# Altium PCB mini_backplane.PcbDoc (part 2 of 5)
Units mm, origin at the board's own origin, x right, y up, seen from the top; angles counter-clockwise.
Board outline 232.03 x 195 mm, 4 copper layers (Top Layer, GND, POWER, Bottom Layer); 241 components, 200 nets, 1637 pads, 676 vias.
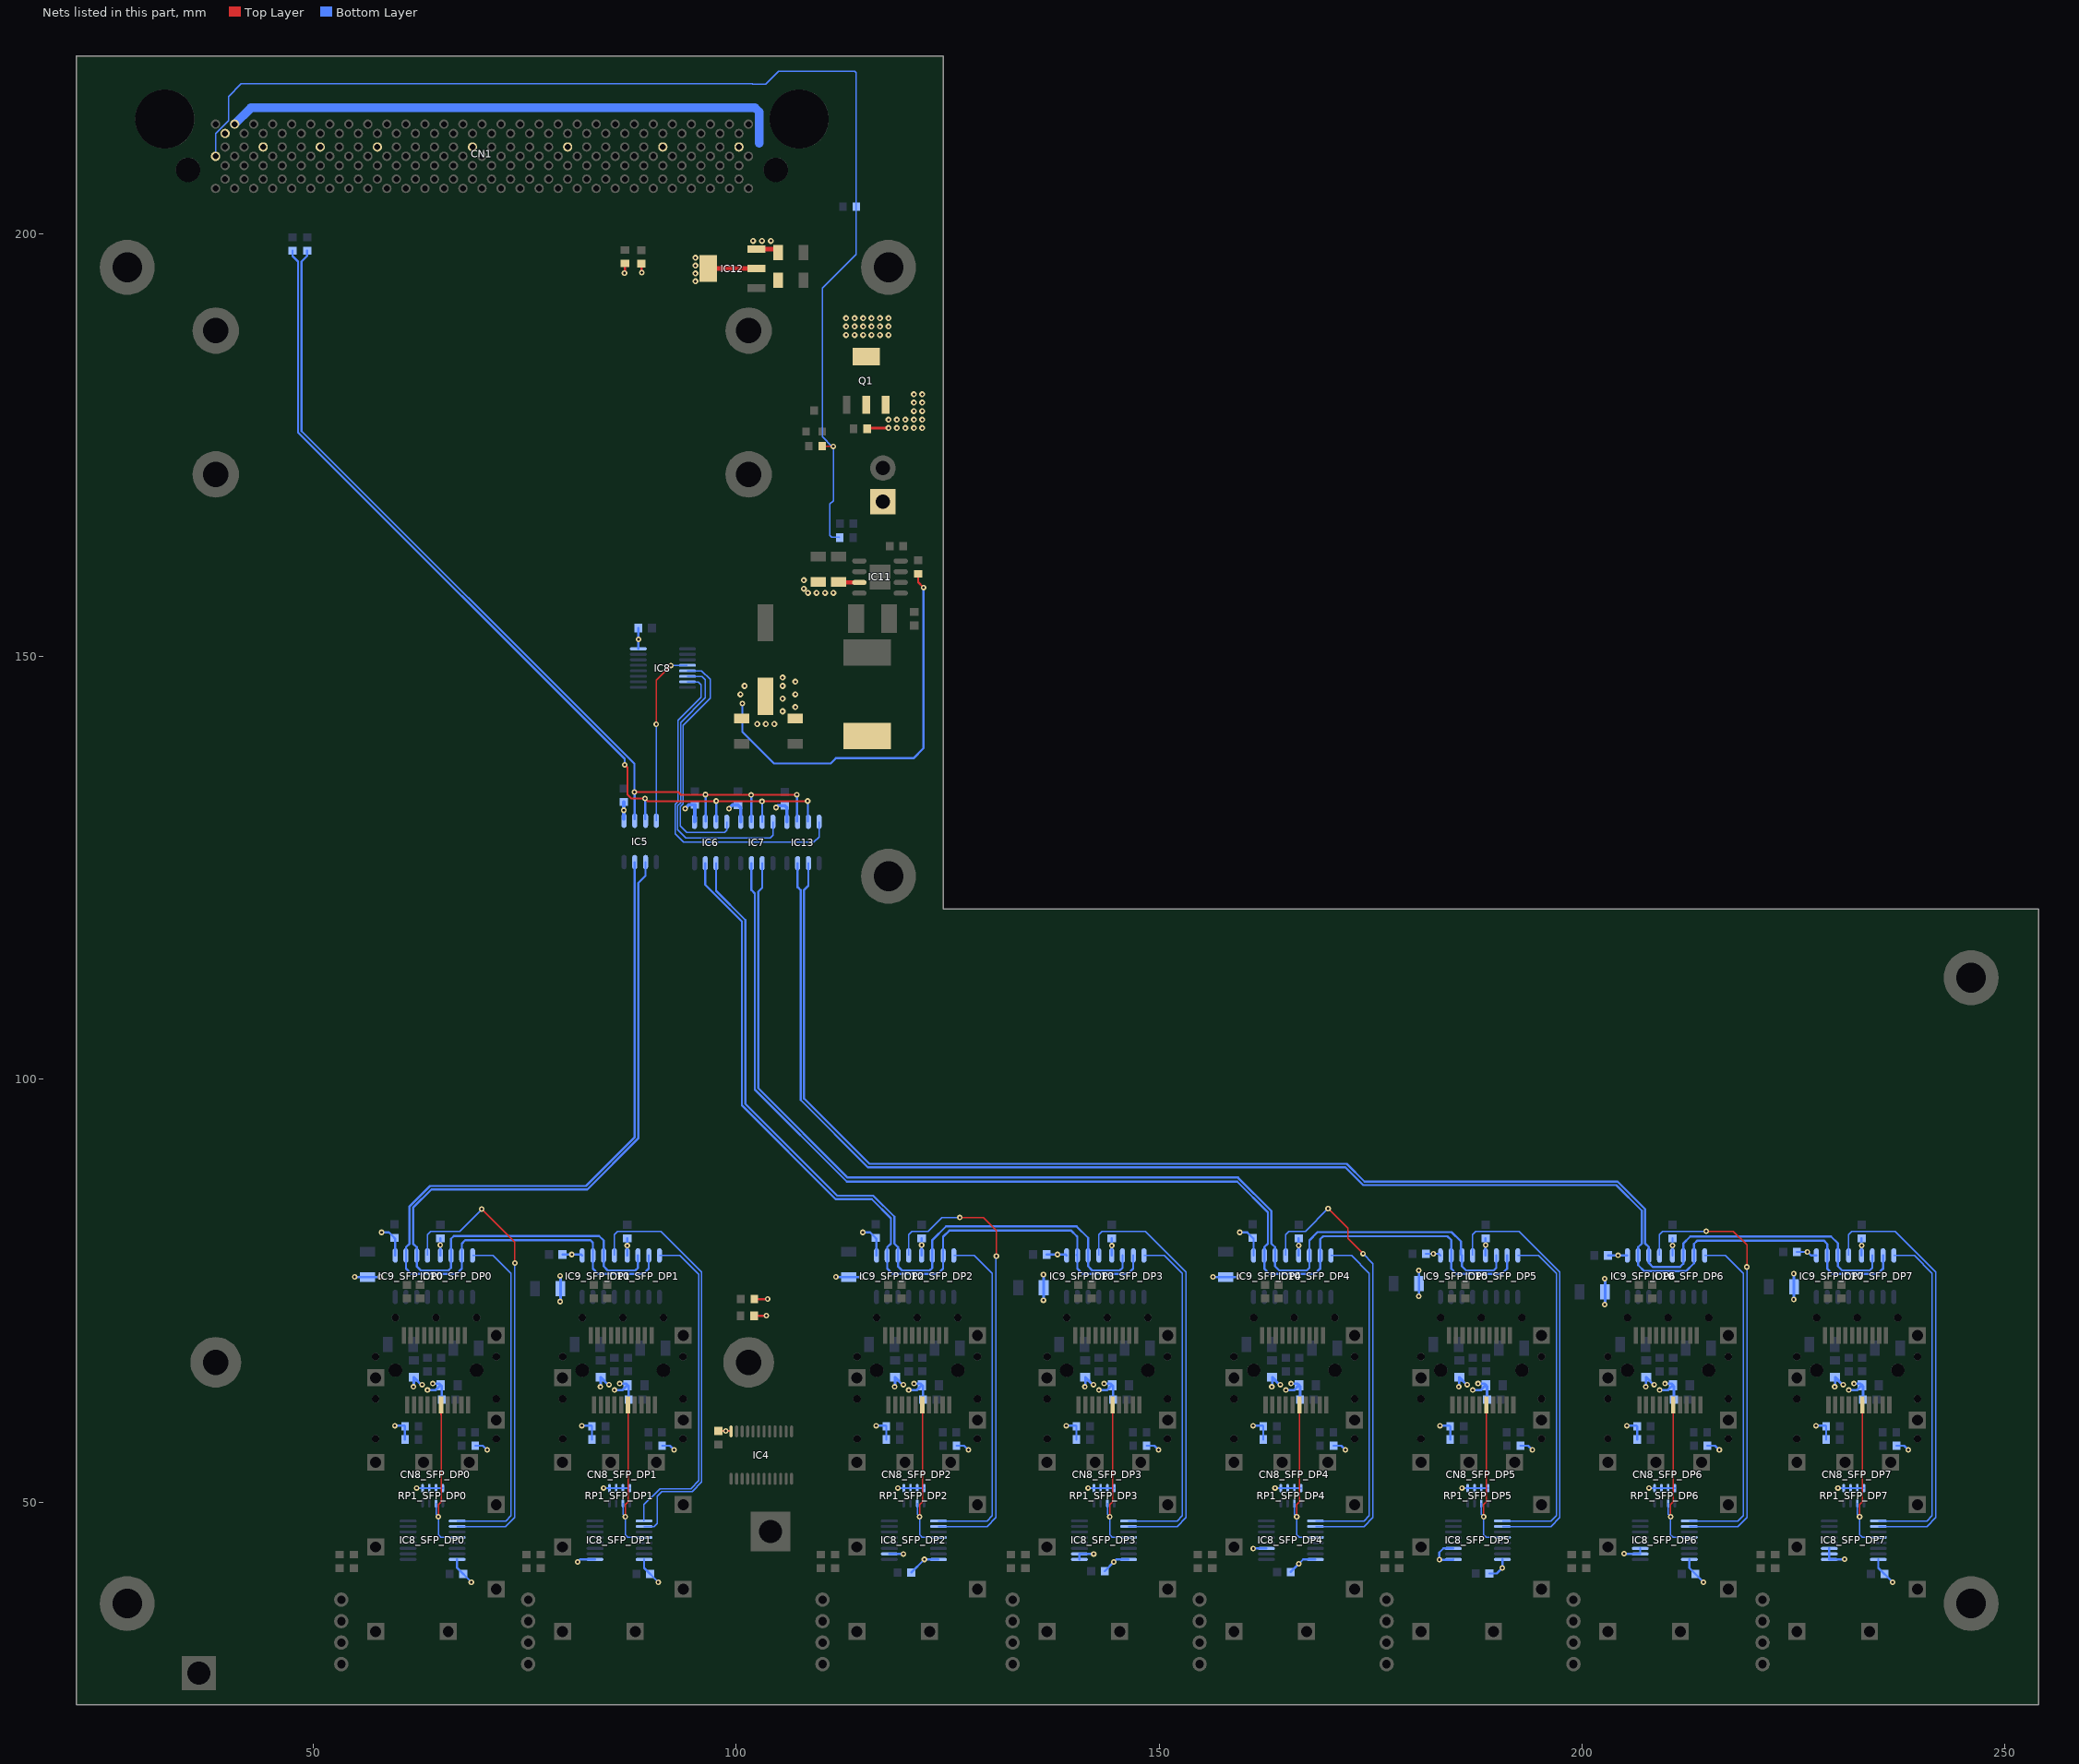
[diagram p4: the nets of this part, all layers, seen from the top]

## Via types
v1: diameter 0.66, hole 0.305, Top Layer to Bottom Layer, tented both sides, 576 vias
v2: diameter 0.711, hole 0.33, Top Layer to Bottom Layer, tented both sides, 97 vias
v3: diameter 0.66, hole 0.305, Top Layer to Bottom Layer, 3 vias

## Nets (pads, with @x,y where several pads share a name; then routed paths per layer and width w, separated by ;. In a path a pad name is that pad's centre, name@x,y a point inside that pad or via, vN(x,y) a via of type N, cw(c..) or ccw(c..) an arc to the next point about the centre after c; other vN are vias at no path point)
+3V3: C75.2 C76.2 C77.2 C78.2 C80_SFP_DP0.2 C80_SFP_DP1.2 C80_SFP_DP2.2 C80_SFP_DP3.2 C80_SFP_DP4.2 C80_SFP_DP5.2 C80_SFP_DP6.2 C80_SFP_DP7.2 C81_SFP_DP0.2 C81_SFP_DP1.2 C81_SFP_DP2.2 C81_SFP_DP3.2 C81_SFP_DP4.2 C81_SFP_DP5.2 C81_SFP_DP6.2 C81_SFP_DP7.2 C85.1 C90.2 C92.2 C93.2 C121.2 C121_SFP_DP0.2 C121_SFP_DP1.2 C121_SFP_DP2.2 C121_SFP_DP3.2 C121_SFP_DP4.2 C121_SFP_DP5.2 C121_SFP_DP6.2 C121_SFP_DP7.2 C122_SFP_DP0.2 C122_SFP_DP1.2 C122_SFP_DP2.2 C122_SFP_DP3.2 C122_SFP_DP4.2 C122_SFP_DP5.2 C122_SFP_DP6.2 C122_SFP_DP7.2 C123_SFP_DP0.2 C123_SFP_DP1.2 C123_SFP_DP2.2 C123_SFP_DP3.2 C123_SFP_DP4.2 C123_SFP_DP5.2 C123_SFP_DP6.2 C123_SFP_DP7.2 IC4.24 IC5.5 IC6.5 IC7.5 IC8.16 IC8_SFP_DP0.16 IC8_SFP_DP1.1 IC8_SFP_DP1.16 IC8_SFP_DP2.2 IC8_SFP_DP2.16 IC8_SFP_DP3.1 IC8_SFP_DP3.2 IC8_SFP_DP3.16 IC8_SFP_DP4.3 IC8_SFP_DP4.16 IC8_SFP_DP5.1 IC8_SFP_DP5.3 IC8_SFP_DP5.16 IC8_SFP_DP6.2 IC8_SFP_DP6.3 IC8_SFP_DP6.16 IC8_SFP_DP7.1 IC8_SFP_DP7.2 IC8_SFP_DP7.3 IC8_SFP_DP7.16 IC9_SFP_DP0.5 IC9_SFP_DP1.5 IC9_SFP_DP2.5 IC9_SFP_DP3.5 IC9_SFP_DP4.5 IC9_SFP_DP5.5 IC9_SFP_DP6.5 IC9_SFP_DP7.5 IC10_SFP_DP0.5 IC10_SFP_DP1.5 IC10_SFP_DP2.5 IC10_SFP_DP3.5 IC10_SFP_DP4.5 IC10_SFP_DP5.5 IC10_SFP_DP6.5 IC10_SFP_DP7.5 IC13.5 L1.2 L8_SFP_DP0.2 L8_SFP_DP1.2 L8_SFP_DP2.2 L8_SFP_DP3.2 L8_SFP_DP4.2 L8_SFP_DP5.2 L8_SFP_DP6.2 L8_SFP_DP7.2 L9_SFP_DP0.2 L9_SFP_DP1.2 L9_SFP_DP2.2 L9_SFP_DP3.2 L9_SFP_DP4.2 L9_SFP_DP5.2 L9_SFP_DP6.2 L9_SFP_DP7.2 R1.2 R2.2 R3.2 R4.2 R21_SFP_DP0.2 R21_SFP_DP1.2 R21_SFP_DP2.2 R21_SFP_DP3.2 R21_SFP_DP4.2 R21_SFP_DP5.2 R21_SFP_DP6.2 R21_SFP_DP7.2 R22_SFP_DP0.2 R22_SFP_DP1.2 R22_SFP_DP2.2 R22_SFP_DP3.2 R22_SFP_DP4.2 R22_SFP_DP5.2 R22_SFP_DP6.2 R22_SFP_DP7.2 R71_SFP_DP0.1 R71_SFP_DP1.1 R71_SFP_DP2.1 R71_SFP_DP3.1 R71_SFP_DP4.1 R71_SFP_DP5.1 R71_SFP_DP6.1 R71_SFP_DP7.1 R76.2 RP1_SFP_DP0.1 RP1_SFP_DP0.2 RP1_SFP_DP0.3 RP1_SFP_DP0.4 RP1_SFP_DP1.1 RP1_SFP_DP1.2 RP1_SFP_DP1.3 RP1_SFP_DP1.4 RP1_SFP_DP2.1 RP1_SFP_DP2.2 RP1_SFP_DP2.3 RP1_SFP_DP2.4 RP1_SFP_DP3.1 RP1_SFP_DP3.2 RP1_SFP_DP3.3 RP1_SFP_DP3.4 RP1_SFP_DP4.1 RP1_SFP_DP4.2 RP1_SFP_DP4.3 RP1_SFP_DP4.4 RP1_SFP_DP5.1 RP1_SFP_DP5.2 RP1_SFP_DP5.3 RP1_SFP_DP5.4 RP1_SFP_DP6.1 RP1_SFP_DP6.2 RP1_SFP_DP6.3 RP1_SFP_DP6.4 RP1_SFP_DP7.1 RP1_SFP_DP7.2 RP1_SFP_DP7.3 RP1_SFP_DP7.4 | length 294.8
  Top Layer w0.254: v1(86.792,195.326) 86.843,195.377 R2.2@86.843,196.456 ; R1.2@88.798,196.431 88.798,195.402 v1(88.824,195.377) ; C75.2@97.892,58.407 v1(98.755,58.407) 99.339,58.407 IC4.24@99.397,58.35 ; R3.2@102.121,72.009 103.556,72.009 v1(103.581,72.034) ; R4.2@102.146,73.99 103.683,73.99 v1(103.708,74.016) ; R76.2@121.514,159.753 121.514,158.775 v1(122.149,158.14)
  Bottom Layer w0.254: v1(58.064,81.89) 58.941,81.89 C80_SFP_DP0.2@59.588,81.242 59.69,81.14 IC9_SFP_DP0.5@59.69,79.158 ; v1(59.639,59.03) 60.77,59.03 R21_SFP_DP0.2@60.846,58.953 R22_SFP_DP0.2@60.846,57.404 ; v1(62.23,51.664) 62.255,51.638 RP1_SFP_DP0.4@65.316,51.638 ; IC10_SFP_DP0.5@65.024,79.158 v1(65.024,80.391) C81_SFP_DP0.2@65.024,81.191 ; IC8_SFP_DP0.16@67.01,43.216 67.01,42.223 68.682,40.551 v1(68.682,40.513) ; R71_SFP_DP0.1@69.151,56.667 70.053,56.667 v1(70.561,56.159) ; C80_SFP_DP1.2@79.464,79.273 v1(80.569,79.273) 81.673,79.273 IC9_SFP_DP1.5@81.788,79.158 ; v3(81.255,42.926) 81.545,43.216 IC8_SFP_DP1.1@83.308,43.216 ; v1(81.737,59.03) 82.868,59.03 R21_SFP_DP1.2@82.944,58.953 R22_SFP_DP1.2@82.944,57.404 ; v1(84.328,51.664) 84.353,51.638 RP1_SFP_DP1.4@87.414,51.638 ; IC10_SFP_DP1.5@87.122,79.158 v1(87.122,80.315) C81_SFP_DP1.2@87.122,81.191 ; IC8_SFP_DP1.16@89.108,43.216 89.108,42.223 90.78,40.551 v1(90.78,40.513) ; R71_SFP_DP1.1@91.249,56.667 92.151,56.667 v1(92.659,56.159) ; v1(100.736,144.424) 100.736,141.072 104.47,137.338 111.176,137.338 111.785,137.947 120.955,137.947 122.149,139.141 v1(122.149,158.14) ; v1(114.96,81.89) 115.837,81.89 C80_SFP_DP2.2@116.484,81.242 116.586,81.14 IC9_SFP_DP2.5@116.586,79.158 ; v1(116.535,59.03) 117.666,59.03 R21_SFP_DP2.2@117.742,58.953 R22_SFP_DP2.2@117.742,57.404 ; IC8_SFP_DP2.2@118.106,43.866 v1(119.761,43.866) ; v1(119.126,51.664) 119.151,51.638 RP1_SFP_DP2.4@122.212,51.638 ; C121_SFP_DP2.2@120.688,41.656 v1(122.248,43.216) IC8_SFP_DP2.16@123.906,43.216 ; IC10_SFP_DP2.5@121.92,79.158 v1(121.92,80.391) C81_SFP_DP2.2@121.92,81.191 ; R71_SFP_DP2.1@126.047,56.667 126.949,56.667 v1(127.457,56.159) ; C80_SFP_DP3.2@136.69,79.273 v1(137.973,79.273) 138.95,79.273 IC9_SFP_DP3.5@139.065,79.158 ; v1(139.014,59.03) 140.145,59.03 R21_SFP_DP3.2@140.221,58.953 R22_SFP_DP3.2@140.221,57.404 ; IC8_SFP_DP3.1@140.585,43.216 IC8_SFP_DP3.2@140.585,43.866 v1(142.265,43.866) ; v1(141.605,51.664) 141.63,51.638 RP1_SFP_DP3.4@144.691,51.638 ; C121_SFP_DP3.2@143.573,41.834 v1(144.647,42.907) 144.956,43.216 IC8_SFP_DP3.16@146.385,43.216 ; IC10_SFP_DP3.5@144.399,79.158 v1(144.399,80.315) C81_SFP_DP3.2@144.399,81.191 ; R71_SFP_DP3.1@148.526,56.667 149.428,56.667 v1(149.936,56.159) ; v1(159.537,81.89) 160.414,81.89 C80_SFP_DP4.2@161.061,81.242 161.163,81.14 IC9_SFP_DP4.5@161.163,79.158 ; v1(161.112,59.03) 162.243,59.03 R21_SFP_DP4.2@162.319,58.953 R22_SFP_DP4.2@162.319,57.404 ; v1(161.138,44.501) 161.153,44.516 IC8_SFP_DP4.3@162.683,44.516 ; v1(163.703,51.664) 163.728,51.638 RP1_SFP_DP4.4@166.789,51.638 ; C121_SFP_DP4.2@165.544,41.732 v1(166.503,42.691) 167.029,43.216 IC8_SFP_DP4.16@168.483,43.216 ; IC10_SFP_DP4.5@166.497,79.158 v1(166.497,80.34) C81_SFP_DP4.2@166.497,81.191 ; R71_SFP_DP4.1@170.624,56.667 171.526,56.667 v1(172.034,56.159) ; C80_SFP_DP5.2@181.546,79.35 v1(182.423,79.35) 183.069,79.35 IC9_SFP_DP5.5@183.261,79.158 ; v1(183.21,59.03) 184.341,59.03 R21_SFP_DP5.2@184.417,58.953 R22_SFP_DP5.2@184.417,57.404 ; IC8_SFP_DP5.1@184.781,43.216 184.744,43.18 v1(183.134,43.18) 183.134,44.044 183.607,44.516 IC8_SFP_DP5.3@184.781,44.516 ; v1(185.801,51.664) 185.826,51.638 RP1_SFP_DP5.4@188.887,51.638 ; IC10_SFP_DP5.5@188.595,79.158 v1(188.595,80.391) C81_SFP_DP5.2@188.595,81.191 ; C121_SFP_DP5.2@189.039,41.554 189.912,41.554 v1(190.581,42.223) IC8_SFP_DP5.16@190.581,43.216 ; R71_SFP_DP5.1@192.722,56.667 193.624,56.667 v1(194.132,56.159) ; C80_SFP_DP6.2@203.06,79.172 v1(204.267,79.172) 205.345,79.172 IC9_SFP_DP6.5@205.359,79.158 ; v1(204.978,43.891) 205.003,43.866 IC8_SFP_DP6.2@206.879,43.866 IC8_SFP_DP6.3@206.879,44.516 ; v1(205.308,59.03) 206.439,59.03 R21_SFP_DP6.2@206.515,58.953 R22_SFP_DP6.2@206.515,57.404 ; v1(207.899,51.664) 207.924,51.638 RP1_SFP_DP6.4@210.985,51.638 ; IC10_SFP_DP6.5@210.693,79.158 v1@210.693,80.467 ; v1(210.693,80.34) v1@210.693,80.467 ; C81_SFP_DP6.2@210.693,81.191 v1@210.693,80.467 ; IC8_SFP_DP6.16@212.679,43.216 212.679,42.223 214.351,40.551 v1(214.351,40.513) ; R71_SFP_DP6.1@214.82,56.667 215.722,56.667 v1(216.23,56.159) ; C80_SFP_DP7.2@225.387,79.578 v1(226.644,79.578) 227.064,79.158 IC9_SFP_DP7.5@227.711,79.158 ; v1(227.66,59.03) 228.791,59.03 R21_SFP_DP7.2@228.867,58.953 R22_SFP_DP7.2@228.867,57.404 ; IC8_SFP_DP7.3@229.231,44.516 IC8_SFP_DP7.1@229.231,43.216 230.999,43.216 v1(231.038,43.256) ; v1(230.251,51.664) 230.276,51.638 RP1_SFP_DP7.4@233.337,51.638 ; IC10_SFP_DP7.5@233.045,79.158 C81_SFP_DP7.2@233.045,81.191 ; IC8_SFP_DP7.16@235.031,43.216 235.031,42.223 236.703,40.551 v1(236.703,40.513) ; R71_SFP_DP7.1@237.172,56.667 238.074,56.667 v1(238.582,56.159)
  Bottom Layer w0.305: v1(54.889,76.632) 54.916,76.605 C122_SFP_DP0.2@56.388,76.605 57.911,76.605 v1(57.937,76.632) ; v1(61.849,63.627) 61.9,63.678 L8_SFP_DP0.2@61.9,64.761 62.779,63.881 v1(62.865,63.881) ; v1(63.5,63.246) 64.481,63.246 L9_SFP_DP0.2@65.065,63.83 ; v1(64.135,64.008) 64.888,64.008 L9_SFP_DP0.2@65.065,63.83 ; C123_SFP_DP0.2@65.189,62.103 65.189,63.706 L9_SFP_DP0.2@65.065,63.83 ; v1(79.197,73.711) 79.224,73.738 C122_SFP_DP1.2@79.224,75.209 79.224,76.732 v1(79.197,76.759) ; v1(83.947,63.627) 83.998,63.678 L8_SFP_DP1.2@83.998,64.761 84.877,63.881 v1(84.963,63.881) ; v1(85.598,63.246) 86.579,63.246 L9_SFP_DP1.2@87.163,63.83 ; v1(86.233,64.008) 86.986,64.008 L9_SFP_DP1.2@87.163,63.83 ; C123_SFP_DP1.2@87.287,62.103 87.287,63.706 L9_SFP_DP1.2@87.163,63.83 ; C121.2@88.43,153.34 88.43,152.032 v1(88.443,152.019) 88.438,152.015 IC8.16@88.438,150.89 ; v1(111.785,76.632) 111.812,76.605 C122_SFP_DP2.2@113.284,76.605 114.807,76.605 v1(114.833,76.632) ; v1(118.745,63.627) 118.796,63.678 L8_SFP_DP2.2@118.796,64.761 119.675,63.881 v1(119.761,63.881) ; v1(120.396,63.246) 121.377,63.246 L9_SFP_DP2.2@121.961,63.83 ; v1(121.031,64.008) 121.784,64.008 L9_SFP_DP2.2@121.961,63.83 ; C123_SFP_DP2.2@122.085,62.103 122.085,63.706 L9_SFP_DP2.2@121.961,63.83 ; v1(136.322,73.863) 136.349,73.89 C122_SFP_DP3.2@136.349,75.362 136.349,76.884 v1(136.322,76.911) ; v1(141.224,63.627) 141.275,63.678 L8_SFP_DP3.2@141.275,64.761 142.154,63.881 v1(142.24,63.881) ; v1(142.875,63.246) 143.856,63.246 L9_SFP_DP3.2@144.44,63.83 ; v1(143.51,64.008) 144.263,64.008 L9_SFP_DP3.2@144.44,63.83 ; C123_SFP_DP3.2@144.564,62.103 144.564,63.706 L9_SFP_DP3.2@144.44,63.83 ; v1(156.362,76.632) 156.389,76.605 C122_SFP_DP4.2@157.861,76.605 159.384,76.605 v1(159.41,76.632) ; v1(163.322,63.627) 163.373,63.678 L8_SFP_DP4.2@163.373,64.761 164.252,63.881 v1(164.338,63.881) ; v1(164.973,63.246) 165.954,63.246 L9_SFP_DP4.2@166.538,63.83 ; v1(165.608,64.008) 166.361,64.008 L9_SFP_DP4.2@166.538,63.83 ; C123_SFP_DP4.2@166.662,62.103 166.662,63.706 L9_SFP_DP4.2@166.538,63.83 ; v1(180.696,74.346) 180.722,74.373 C122_SFP_DP5.2@180.722,75.844 180.722,77.367 v1(180.696,77.394) ; v1(185.42,63.627) 185.471,63.678 L8_SFP_DP5.2@185.471,64.761 186.35,63.881 v1(186.436,63.881) ; v1(187.071,63.246) 188.052,63.246 L9_SFP_DP5.2@188.636,63.83 ; v1(187.706,64.008) 188.459,64.008 L9_SFP_DP5.2@188.636,63.83 ; C123_SFP_DP5.2@188.76,62.103 188.76,63.706 L9_SFP_DP5.2@188.636,63.83 ; v1(202.692,73.355) 202.719,73.382 C122_SFP_DP6.2@202.719,74.854 202.719,76.376 v1(202.692,76.403) ; v1(207.518,63.627) 207.569,63.678 L8_SFP_DP6.2@207.569,64.761 208.448,63.881 v1(208.534,63.881) ; v1(209.169,63.246) 210.15,63.246 L9_SFP_DP6.2@210.734,63.83 ; v1(209.804,64.008) 210.557,64.008 L9_SFP_DP6.2@210.734,63.83 ; C123_SFP_DP6.2@210.858,62.103 210.858,63.706 L9_SFP_DP6.2@210.734,63.83 ; v1(225.019,73.965) 225.045,73.992 C122_SFP_DP7.2@225.045,75.463 225.045,76.986 v1(225.019,77.013) ; v1(229.87,63.627) 229.921,63.678 L8_SFP_DP7.2@229.921,64.761 230.8,63.881 v1(230.886,63.881) ; v1(231.521,63.246) 232.502,63.246 L9_SFP_DP7.2@233.086,63.83 ; v1(232.156,64.008) 232.909,64.008 L9_SFP_DP7.2@233.086,63.83 ; C123_SFP_DP7.2@233.21,62.103 233.21,63.706 L9_SFP_DP7.2@233.086,63.83
  Bottom Layer w0.406: IC5.5@86.716,130.771 v1(86.716,131.801) C77.2@86.716,132.779 ; v1(93.955,132.004) 94.399,132.448 C90.2@95.123,132.448 95.123,130.491 IC6.5@95.072,130.441 ; v1(99.136,132.004) 99.555,132.423 C76.2@100.203,132.423 100.533,132.093 IC7.5@100.533,130.441 ; v1(104.699,132.131) 104.915,132.347 C78.2@105.74,132.347 105.994,132.093 IC13.5@105.994,130.441
  other v1: 233.045,80.34
  other v2: 102.5,142 103.5,142 104.5,142 105.5,143.5 107,144 105.5,145 100.5,145.5 107,145.5 101,146.5 105.5,146.5 107,147 105.5,147.5
+3V3_MP: C89.2 CN1.4 IC12.2 IC12.4 | length 72.4
  Top Layer w0.508: IC12.4@96.693,195.859 IC12.2@102.393,195.859
  Bottom Layer w1.016: CN1.4@40.702,212.934 42.627,214.859 102.235,214.859 102.718,214.376 102.718,210.668
  other v2: 95.174,194.361 95.174,195.284 95.174,196.207 95.174,197.129
+12V_MCH: CN1.2 CN1.9 CN1.18 CN1.27 CN1.42 CN1.57 CN1.72 CN1.84 Q1.2 Q1.4
  other v2: 113,188 114,188 115,188 116,188 117,188 118,188 113,189 114,189 115,189 116,189 117,189 118,189 113,190 114,190 115,190 116,190 117,190 118,190
+12V_PSU: C86.2 C87.2 C88.2 CN2.1 IC11.7 IC12.3 Q1.3 R6.2 | length 7.2
  Top Layer w0.305: R6.2@115.481,176.911 115.57,177 v2(118,177)
  Top Layer w0.508: IC12.3@102.393,198.159 C86.2@104.556,198.159 ; C88.2@112.116,158.799 112.175,158.74 IC11.7@114.554,158.74
  other v2: 108.5,157.5 109.5,157.5 110.5,157.5 111.5,157.5 108,158 108,159 119,177 120,177 121,177 122,177 118,178 119,178 120,178 121,178 122,178 121,179 122,179 121,180 122,180 121,181 122,181 102.006,199.136 103.048,199.136 104.089,199.136
BUF_EN0: IC5.8 IC8.4 | length 21
  Top Layer w0.152: v1(90.551,141.961) 90.551,147.193 v1(92.278,148.92)
  Bottom Layer w0.152: IC5.8@90.551,130.568 v1(90.551,141.961) ; v1(92.278,148.92) 92.298,148.94 IC8.4@94.238,148.94
BUF_EN1: IC6.8 IC8.5 | length 28.8
  Bottom Layer w0.152: IC8.5@94.238,148.29 95.905,148.29 96.926,147.269 96.926,145.034 93.726,141.834 93.726,132.565 93.396,132.235 93.396,129.972 94.183,129.184 98.603,129.184 98.882,129.464 98.882,130.413 IC6.8@98.882,130.441
BUF_EN2: IC7.8 IC8.6 | length 34.7
  Bottom Layer w0.152: IC8.6@94.238,147.64 95.946,147.64 96.342,147.244 96.342,145.085 93.421,142.164 93.421,132.692 93.091,132.362 93.091,129.489 94.031,128.549 104.013,128.549 104.343,128.88 IC7.8@104.343,130.441
BUF_EN3: IC8.7 IC13.8 | length 40.1
  Bottom Layer w0.152: IC8.7@94.238,146.99 95.503,146.99 95.834,146.66 95.834,145.161 93.116,142.443 93.116,132.818 92.786,132.488 92.786,129.032 93.802,128.016 109.169,128.016 109.804,128.651 IC13.8@109.804,130.441
BULK_EN: CN1.170 R5.1 R11.2 R12.1 | length 143
  Top Layer w0.152: R11.2@110.172,174.854 111.455,174.854 v1(111.481,174.828)
  Bottom Layer w0.152: CN1.170@38.452,209.134 38.452,211.81 39.973,213.331 39.973,216.198 41.478,217.703 101.879,217.703 101.93,217.653 103.48,217.653 105.029,219.202 114.021,219.202 114.198,219.024 114.198,197.536 110.185,193.523 110.185,175.971 111.354,174.803 v1@111.455,174.803 ; v1(111.481,174.828) 111.481,168.427 111.074,168.021 111.074,164.313 111.277,164.109 112.154,164.109 R5.1@112.23,164.033
DETECT_SFP_DP0: CN8_SFP_DP0.6 IC8_SFP_DP0.12 RP1_SFP_DP0.6 | length 20.9
  Top Layer w0.152: v1(64.795,48.26) 64.795,49.682 65.126,50.013 65.126,61.477 CN8_SFP_DP0.6@65.109,61.494 65.109,60.274
  Bottom Layer w0.152: RP1_SFP_DP0.6@64.516,49.86 64.516,48.54 v1(64.795,48.26) 64.795,46.126 65.1,45.822 65.684,45.822 ; 65.781,45.822 65.684,45.822 ; IC8_SFP_DP0.12@67.01,45.816 67.004,45.822 65.684,45.822
DETECT_SFP_DP1: CN8_SFP_DP1.6 IC8_SFP_DP1.12 RP1_SFP_DP1.6 | length 20.9
  Top Layer w0.152: v1(86.893,48.26) 86.893,49.682 87.224,50.013 87.224,61.477 CN8_SFP_DP1.6@87.207,61.494 87.207,60.274
  Bottom Layer w0.152: RP1_SFP_DP1.6@86.614,49.86 86.614,48.54 v1(86.893,48.26) 86.893,46.126 87.198,45.822 87.782,45.822 ; 87.879,45.822 87.782,45.822 ; IC8_SFP_DP1.12@89.108,45.816 89.102,45.822 87.782,45.822
DETECT_SFP_DP2: CN8_SFP_DP2.6 IC8_SFP_DP2.12 RP1_SFP_DP2.6 | length 20.9
  Top Layer w0.152: v1(121.691,48.26) 121.691,49.682 122.022,50.013 122.022,61.477 CN8_SFP_DP2.6@122.005,61.494 122.005,60.274
  Bottom Layer w0.152: RP1_SFP_DP2.6@121.412,49.86 121.412,48.54 v1(121.691,48.26) 121.691,46.126 121.996,45.822 122.58,45.822 ; 122.677,45.822 122.58,45.822 ; IC8_SFP_DP2.12@123.906,45.816 123.9,45.822 122.58,45.822
DETECT_SFP_DP3: CN8_SFP_DP3.6 IC8_SFP_DP3.12 RP1_SFP_DP3.6 | length 20.9
  Top Layer w0.152: v1(144.17,48.26) 144.17,49.682 144.501,50.013 144.501,61.477 CN8_SFP_DP3.6@144.484,61.494 144.484,60.274
  Bottom Layer w0.152: RP1_SFP_DP3.6@143.891,49.86 143.891,48.54 v1(144.17,48.26) 144.17,46.126 144.475,45.822 145.059,45.822 ; 145.156,45.822 145.059,45.822 ; IC8_SFP_DP3.12@146.385,45.816 146.379,45.822 145.059,45.822
DETECT_SFP_DP4: CN8_SFP_DP4.6 IC8_SFP_DP4.12 RP1_SFP_DP4.6 | length 20.9
  Top Layer w0.152: v1(166.268,48.26) 166.268,49.682 166.599,50.013 166.599,61.477 CN8_SFP_DP4.6@166.582,61.494 166.582,60.274
  Bottom Layer w0.152: RP1_SFP_DP4.6@165.989,49.86 165.989,48.54 v1(166.268,48.26) 166.268,46.126 166.573,45.822 167.157,45.822 ; 167.254,45.822 167.157,45.822 ; IC8_SFP_DP4.12@168.483,45.816 168.477,45.822 167.157,45.822
DETECT_SFP_DP5: CN8_SFP_DP5.6 IC8_SFP_DP5.12 RP1_SFP_DP5.6 | length 20.9
  Top Layer w0.152: v1(188.366,48.26) 188.366,49.682 188.697,50.013 188.697,61.477 CN8_SFP_DP5.6@188.68,61.494 188.68,60.274
  Bottom Layer w0.152: RP1_SFP_DP5.6@188.087,49.86 188.087,48.54 v1(188.366,48.26) 188.366,46.126 188.671,45.822 189.255,45.822 ; 189.352,45.822 189.255,45.822 ; IC8_SFP_DP5.12@190.581,45.816 190.575,45.822 189.255,45.822
DETECT_SFP_DP6: CN8_SFP_DP6.6 IC8_SFP_DP6.12 RP1_SFP_DP6.6 | length 20.9
  Top Layer w0.152: v1(210.464,48.26) 210.464,49.682 210.795,50.013 210.795,61.477 CN8_SFP_DP6.6@210.778,61.494 210.778,60.274
  Bottom Layer w0.152: RP1_SFP_DP6.6@210.185,49.86 210.185,48.54 v1(210.464,48.26) 210.464,46.126 210.769,45.822 211.353,45.822 ; 211.45,45.822 211.353,45.822 ; IC8_SFP_DP6.12@212.679,45.816 212.673,45.822 211.353,45.822
DETECT_SFP_DP7: CN8_SFP_DP7.6 IC8_SFP_DP7.12 RP1_SFP_DP7.6 | length 20.9
  Top Layer w0.152: v1(232.816,48.26) 232.816,49.682 233.147,50.013 233.147,61.477 CN8_SFP_DP7.6@233.13,61.494 233.13,60.274
  Bottom Layer w0.152: RP1_SFP_DP7.6@232.537,49.86 232.537,48.54 v1(232.816,48.26) 232.816,46.126 233.121,45.822 233.705,45.822 ; 233.802,45.822 233.705,45.822 ; IC8_SFP_DP7.12@235.031,45.816 235.025,45.822 233.705,45.822
EN_FB_RX_SFP_DP0: IC8_SFP_DP0.10 IC9_SFP_DP0.8 | length 56.1
  Top Layer w0.152: v1(69.926,84.633) 73.838,80.721 v1(73.838,78.257)
  Bottom Layer w0.152: IC9_SFP_DP0.8@63.5,79.158 63.5,81.636 63.881,82.017 67.31,82.017 v1(69.926,84.633) ; IC8_SFP_DP0.10@67.01,47.116 72.745,47.116 73.812,48.184 73.812,76.581 ; 73.812,77.216 73.812,76.581 ; v1(73.838,78.257) 73.812,78.232 73.812,76.581
EN_FB_RX_SFP_DP1: IC8_SFP_DP1.10 IC9_SFP_DP1.8 | length 50.6
  Bottom Layer w0.152: IC9_SFP_DP1.8@85.598,79.158 85.598,81.636 85.979,82.017 91.11,82.017 95.91,77.216 95.91,52.375 94.793,51.257 91.237,51.257 90.653,50.673 90.653,47.473 90.296,47.116 IC8_SFP_DP1.10@89.108,47.116
EN_FB_RX_SFP_DP2: IC8_SFP_DP2.10 IC9_SFP_DP2.8 | length 55.5
  Top Layer w0.152: v1(126.441,83.642) 129.21,83.642 130.759,82.093 v1(130.759,79.07)
  Bottom Layer w0.152: IC9_SFP_DP2.8@120.396,79.158 120.396,81.636 120.777,82.017 122.707,82.017 124.333,83.642 v1(126.441,83.642) ; IC8_SFP_DP2.10@123.906,47.116 129.641,47.116 130.708,48.184 130.708,79.019 v1(130.759,79.07)
EN_FB_RX_SFP_DP3: IC8_SFP_DP3.10 IC9_SFP_DP3.8 | length 51.2
  Bottom Layer w0.152: IC9_SFP_DP3.8@142.875,79.158 142.875,81.636 143.256,82.017 148.387,82.017 153.187,77.216 153.187,48.184 152.12,47.116 IC8_SFP_DP3.10@146.385,47.116
EN_FB_RX_SFP_DP4: IC8_SFP_DP4.10 IC9_SFP_DP4.8 | length 55
  Top Layer w0.152: v1(169.977,84.709) 172.314,82.372 172.314,81.178 v1(174.117,79.375)
  Bottom Layer w0.152: IC9_SFP_DP4.8@164.973,79.158 164.973,81.636 165.354,82.017 167.284,82.017 v1(169.977,84.709) ; IC8_SFP_DP4.10@168.483,47.116 174.218,47.116 175.285,48.184 175.285,76.962 ; v1(174.117,79.375) 175.285,78.207 175.285,76.962 ; 175.285,77.216 175.285,76.962
EN_FB_RX_SFP_DP5: IC8_SFP_DP5.10 IC9_SFP_DP5.8 | length 51.2
  Bottom Layer w0.152: IC9_SFP_DP5.8@187.071,79.158 187.071,81.636 187.452,82.017 192.583,82.017 197.383,77.216 197.383,48.184 196.316,47.116 IC8_SFP_DP5.10@190.581,47.116
EN_FB_RX_SFP_DP6: IC8_SFP_DP6.10 IC9_SFP_DP6.8 | length 53.1
  Top Layer w0.152: v1(214.681,82.017) 217.881,82.017 219.481,80.416 v1(219.481,77.8)
  Bottom Layer w0.152: IC9_SFP_DP6.8@209.169,79.158 209.169,81.636 209.55,82.017 v1(214.681,82.017) ; IC8_SFP_DP6.10@212.679,47.116 218.414,47.116 219.481,48.184 v1(219.481,77.8)
EN_FB_RX_SFP_DP7: IC8_SFP_DP7.10 IC9_SFP_DP7.8 | length 51.2
  Bottom Layer w0.152: IC9_SFP_DP7.8@231.521,79.158 231.521,81.636 231.902,82.017 237.033,82.017 241.833,77.216 241.833,48.184 240.766,47.116 IC8_SFP_DP7.10@235.031,47.116
EN_FB_TX_SFP_DP0: IC8_SFP_DP0.9 IC10_SFP_DP0.8 | length 40.7
  Bottom Layer w0.152: IC8_SFP_DP0.9@67.01,47.766 72.76,47.766 73.381,48.387 73.381,77.038 71.261,79.158 IC10_SFP_DP0.8@68.834,79.158
EN_FB_TX_SFP_DP1: IC8_SFP_DP1.9 IC10_SFP_DP1.8 | length 39.6
  Bottom Layer w0.152: IC8_SFP_DP1.9@89.108,47.766 89.108,49.712 90.983,51.587 94.643,51.587 95.58,52.524 95.58,76.937 93.359,79.158 IC10_SFP_DP1.8@90.932,79.158
EN_FB_TX_SFP_DP2: IC8_SFP_DP2.9 IC10_SFP_DP2.8 | length 40.7
  Bottom Layer w0.152: IC8_SFP_DP2.9@123.906,47.766 129.656,47.766 130.277,48.387 130.277,77.038 128.157,79.158 IC10_SFP_DP2.8@125.73,79.158
EN_FB_TX_SFP_DP3: IC8_SFP_DP3.9 IC10_SFP_DP3.8 | length 40.7
  Bottom Layer w0.152: IC8_SFP_DP3.9@146.385,47.766 152.135,47.766 152.756,48.387 152.756,77.038 150.636,79.158 IC10_SFP_DP3.8@148.209,79.158
EN_FB_TX_SFP_DP4: IC8_SFP_DP4.9 IC10_SFP_DP4.8 | length 40.7
  Bottom Layer w0.152: IC8_SFP_DP4.9@168.483,47.766 174.233,47.766 174.854,48.387 174.854,77.038 172.734,79.158 IC10_SFP_DP4.8@170.307,79.158
EN_FB_TX_SFP_DP5: IC8_SFP_DP5.9 IC10_SFP_DP5.8 | length 40.7
  Bottom Layer w0.152: IC8_SFP_DP5.9@190.581,47.766 196.331,47.766 196.952,48.387 196.952,77.038 194.832,79.158 IC10_SFP_DP5.8@192.405,79.158
EN_FB_TX_SFP_DP6: IC8_SFP_DP6.9 IC10_SFP_DP6.8 | length 40.7
  Bottom Layer w0.152: IC8_SFP_DP6.9@212.679,47.766 218.429,47.766 219.05,48.387 219.05,77.038 216.93,79.158 IC10_SFP_DP6.8@214.503,79.158
EN_FB_TX_SFP_DP7: IC8_SFP_DP7.9 IC10_SFP_DP7.8 | length 40.7
  Bottom Layer w0.152: IC8_SFP_DP7.9@235.031,47.766 240.781,47.766 241.402,48.387 241.402,77.038 239.282,79.158 IC10_SFP_DP7.8@236.855,79.158
FB_01_N: IC5.3 IC9_SFP_DP0.6 IC9_SFP_DP1.6 IC10_SFP_DP0.7 IC10_SFP_DP1.7 | length 107.7
  Bottom Layer w0.254: IC5.3@88.011,125.668 88.011,93.158 82.229,87.376 63.789,87.376 61.392,84.979 61.392,80.569 60.96,80.137 IC9_SFP_DP0.6@60.96,79.158 60.96,77.597 61.57,76.987 66.954,76.987 67.564,77.597 IC10_SFP_DP0.7@67.564,79.158 67.564,80.569 67.97,80.975 82.753,80.975 83.058,80.67 IC9_SFP_DP1.6@83.058,79.158 83.058,77.597 83.668,76.987 89.052,76.987 89.662,77.597 IC10_SFP_DP1.7@89.662,79.158
FB_01_P: IC5.2 IC9_SFP_DP0.7 IC9_SFP_DP1.7 IC10_SFP_DP0.6 IC10_SFP_DP1.6 | length 105.3
  Bottom Layer w0.254: IC10_SFP_DP1.6@88.392,79.158 88.392,77.699 88.087,77.394 84.811,77.394 84.328,77.876 IC9_SFP_DP1.7@84.328,79.158 84.328,80.924 83.795,81.458 66.624,81.458 66.294,81.128 IC10_SFP_DP0.6@66.294,79.158 66.294,77.699 65.989,77.394 62.713,77.394 62.23,77.876 IC9_SFP_DP0.7@62.23,79.158 62.23,80.137 61.798,80.569 61.798,84.811 63.957,86.97 82.398,86.97 88.417,92.989 88.417,123.19 89.281,124.054 IC5.2@89.281,125.668
FB_23_N: IC6.3 IC9_SFP_DP2.6 IC9_SFP_DP3.6 IC10_SFP_DP2.7 IC10_SFP_DP3.7 | length 99.6
  Bottom Layer w0.254: IC6.3@96.342,125.541 96.342,122.987 100.673,118.656 100.673,96.914 111.76,85.827 116.027,85.827 118.288,83.566 118.288,80.569 117.856,80.137 IC9_SFP_DP2.6@117.856,79.158 117.856,77.597 118.466,76.987 123.85,76.987 124.46,77.597 IC10_SFP_DP2.7@124.46,79.158 124.46,81.356 125.197,82.093 139.624,82.093 140.259,81.458 140.335,81.382 IC9_SFP_DP3.6@140.335,79.158 ; IC9_SFP_DP3.6@140.259,79.234 IC9_SFP_DP3.6@140.335,79.158 ; IC10_SFP_DP3.7@146.939,79.158 146.939,77.597 146.329,76.987 140.945,76.987 140.335,77.597 IC9_SFP_DP3.6@140.335,79.158
FB_23_P: IC6.2 IC9_SFP_DP2.7 IC9_SFP_DP3.7 IC10_SFP_DP2.6 IC10_SFP_DP3.6 | length 96.5
  Bottom Layer w0.254: IC6.2@97.612,125.541 97.612,122.292 101.079,118.824 101.079,97.082 111.928,86.233 116.196,86.233 118.694,83.734 118.694,80.569 119.126,80.137 IC9_SFP_DP2.7@119.126,79.158 119.126,77.876 119.609,77.394 122.885,77.394 123.19,77.699 IC10_SFP_DP2.6@123.19,79.158 123.19,80.975 124.816,82.601 132.207,82.601 ; 133.096,82.601 132.207,82.601 ; IC10_SFP_DP3.6@145.669,79.158 145.669,77.699 145.364,77.394 142.088,77.394 141.605,77.876 IC9_SFP_DP3.7@141.605,79.158 141.605,81.229 140.233,82.601 132.207,82.601
FB_45_N: IC7.3 IC9_SFP_DP4.6 IC9_SFP_DP5.6 IC10_SFP_DP4.7 IC10_SFP_DP5.7 | length 138.9
  Bottom Layer w0.254: IC7.3@101.803,125.541 101.803,122.377 102.21,121.971 102.21,98.765 113.09,87.884 159.233,87.884 162.865,84.252 162.865,80.569 162.433,80.137 IC9_SFP_DP4.6@162.433,79.158 162.433,77.597 163.043,76.987 168.427,76.987 169.037,77.597 IC10_SFP_DP4.7@169.037,79.158 169.037,81.077 169.393,81.432 184.074,81.432 184.531,80.975 184.531,79.257 IC9_SFP_DP5.6@184.531,79.158 184.531,77.597 185.141,76.987 190.525,76.987 191.135,77.597 IC10_SFP_DP5.7@191.135,79.158
FB_45_P: IC7.2 IC9_SFP_DP4.7 IC9_SFP_DP5.7 IC10_SFP_DP4.6 IC10_SFP_DP5.6 | length 135.4
  Bottom Layer w0.254: IC7.2@103.073,125.541 103.073,122.631 102.616,122.174 102.616,98.933 113.182,88.367 159.325,88.367 163.271,84.42 163.271,80.569 163.703,80.137 IC9_SFP_DP4.7@163.703,79.158 163.703,77.876 164.186,77.394 167.462,77.394 167.767,77.699 IC10_SFP_DP4.6@167.767,79.158 167.767,80.95 168.732,81.915 184.582,81.915 185.699,80.797 185.699,79.26 IC9_SFP_DP5.7@185.801,79.158 185.801,77.876 186.284,77.394 189.56,77.394 189.865,77.699 IC10_SFP_DP5.6@189.865,79.158
FB_67_N: IC9_SFP_DP6.6 IC9_SFP_DP7.6 IC10_SFP_DP6.7 IC10_SFP_DP7.7 IC13.3 | length 176.9
  Bottom Layer w0.254: IC13.3@107.264,125.541 107.264,124.257 107.264,124.13 107.264,122.707 107.62,122.352 107.62,97.545 115.579,89.586 172.018,89.586 174.126,87.478 204.038,87.478 207.061,84.455 207.061,80.569 206.629,80.137 IC9_SFP_DP6.6@206.629,79.158 206.629,78.029 207.366,77.292 212.293,77.292 213.233,78.232 IC10_SFP_DP6.7@213.233,79.158 213.233,80.518 213.639,80.924 228.575,80.924 229.006,80.493 229.006,79.183 IC9_SFP_DP7.6@228.981,79.158 228.981,77.597 229.591,76.987 234.975,76.987 235.585,77.597 IC10_SFP_DP7.7@235.585,79.158
FB_67_P: IC9_SFP_DP6.7 IC9_SFP_DP7.7 IC10_SFP_DP6.6 IC10_SFP_DP7.6 IC13.2 | length 173.8
  Bottom Layer w0.254: IC13.2@108.534,125.541 108.534,124.333 108.534,124.206 108.534,122.885 108.026,122.377 108.026,97.714 115.748,89.992 172.187,89.992 174.295,87.884 204.207,87.884 207.467,84.623 207.467,80.569 207.899,80.137 IC9_SFP_DP6.7@207.899,79.158 207.899,78.257 208.356,77.8 211.582,77.8 211.963,78.181 IC10_SFP_DP6.6@211.963,79.158 211.963,80.569 212.801,81.407 214.96,81.407 229.438,81.407 230.251,80.594 IC9_SFP_DP7.7@230.251,79.158 230.251,77.876 230.734,77.394 234.01,77.394 234.315,77.699 IC10_SFP_DP7.6@234.315,79.158
FB_MUXED_N: C48.1 IC5.6 IC6.6 IC7.6 IC13.6 | length 112.6
  Top Layer w0.254: v1@87.909,134.01 v1(87.96,133.96) 93.142,133.96 93.472,133.629 v1@107.179,133.629
  Bottom Layer w0.254: C48.1@49.276,197.955 49.276,197.333 48.616,196.672 48.616,176.648 87.96,137.303 v1@87.96,133.985 ; IC5.6@87.986,130.771 v1@87.986,133.934 ; IC6.6@96.393,130.466 v1@96.393,133.629 ; IC7.6@101.803,130.441 v1@101.803,133.579 ; IC13.6@107.204,130.462 v1@107.204,133.625
  other v1: 101.778,133.604 96.368,133.655 107.179,133.651
FB_MUXED_P: C46.1 IC5.7 IC6.7 IC7.7 IC13.7 | length 112.2
  Top Layer w0.254: v1(86.817,137.185) 87.147,136.855 87.147,133.655 87.605,133.198 88.113,133.198 ; 87.86,133.198 88.113,133.198 ; v1@108.449,132.867 89.56,132.867 v1(89.23,133.198) 88.113,133.198
  Bottom Layer w0.254: C46.1@47.549,197.955 47.549,197.333 48.209,196.672 48.209,176.479 86.817,137.871 v1(86.817,137.185) ; IC5.7@89.256,130.771 v1@89.256,133.172 ; IC6.7@97.663,130.466 v1@97.663,132.867 ; IC7.7@103.073,130.441 v1@103.073,132.817 ; IC13.7@108.474,130.462 v1@108.474,132.863
  other v1: 103.048,132.842 97.638,132.893 108.449,132.889